# Allegro board mpu6050-layout.brd
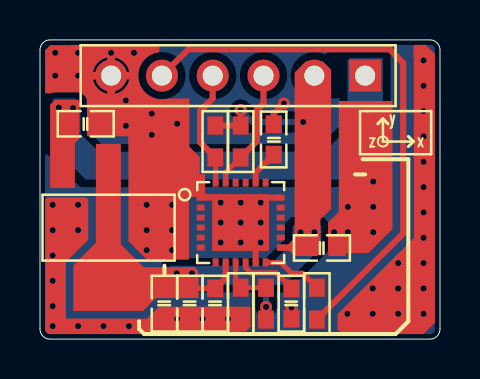
[diagram p0: board, top side]
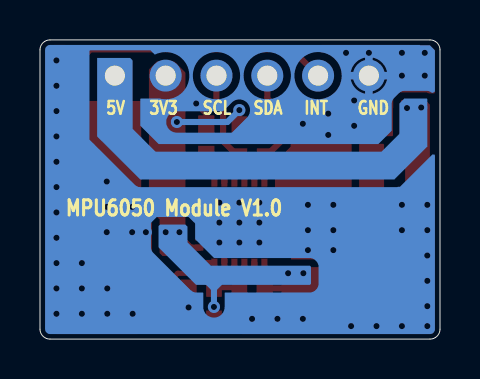
[diagram p1: board, bottom side, seen from below]

Outline 20 x 15 mm; copper layers: TOP, BOTTOM. Coordinates in mm from the lower left corner of the outline.
Outline path: 0,14.5 0,0.5 arc(0.15,0.15) 0.5,0 19.5,0 arc(19.85,0.15) 20,0.5 20,14.5 arc(19.85,14.85) 19.5,15 0.5,15 arc(0.15,14.85) 0,14.5

## Design rules (mm)
net group PWR: nets GND VCC_3V3 VCC_5V

## Placement (name value [footprint] x y rotation side)
C1  104  [C0603]  14.1 4.57 0 top
C2  104  [C0603]  8.76 1.78 270 top
C3  104  [C0603]  12.57 1.78 270 top
C4  2.2uF  [C0603]  11.68 10.01 90 top
C5  106  [C0603]  2.29 10.79 0 top
C6  106  [C0603]  6.22 1.78 270 top
C7  104  [C0603]  7.49 1.78 270 top
J1  CON6  [SIP-6]  16.26 13.21 180 top
NOREF  -  []  19.43 0 90 top
NOREF#2  -  []  0 14.5 0 top
R1  1k  [R0603]  13.84 1.78 90 top
R2  10k  [R0603]  8.76 9.91 90 top
R3  10k  [R0603]  10.03 9.91 90 top
R4  0R  [R0603]  10.03 1.78 90 top
R5  NC  [R0603]  11.3 1.78 90 top
U1  MPU6050  [QFN-24]  10.03 5.84 0 top
U2  AMS1117-3V3  [SOT-223]  3.43 5.59 180 top

## Library data of the parts
C1-C7 = CAP NP
J1 = CON6
R1-R5 = R
U1 = MPU6050_0
U2 = AMS1117-3V3

## Footprints (pads in the part's own frame, mm; a bottom-side part is the same pattern mirrored in y, then rotated)
C0603
  rect 0.889x0.813 smd: 1(-0.762,0) 2(0.762,0)
QFN-24
  rect 0.399x0.3 smd: 1(-2,1.25) 2(-2,0.75) 3(-2,0.25) 4(-2,-0.25) 5(-2,-0.75) 6(-2,-1.25) 13(2,-1.25) 14(2,-0.75) 15(2,-0.25) 16(2,0.25) 17(2,0.75) 18(2,1.25)
  rect 0.3x0.399 smd: 7(-1.25,-2) 8(-0.75,-2) 9(-0.25,-2) 10(0.25,-2) 11(0.75,-2) 12(1.25,-2) 19(1.25,2) 20(0.75,2) 21(0.25,2) 22(-0.25,2) 23(-0.75,2) 24(-1.25,2)
  rect 2.799x2.799 smd: 25(0,0)
R0603
  rect 0.914x0.787 smd: 1(-0.8,0) 2(0.8,0)
SIP-6
  rect 1.6x1.6 hole 1.001: 1(0,0)
  round 1.6 hole 1.001: 2(2.54,0) 3(5.08,0) 4(7.62,0) 5(10.16,0) 6(12.7,0)
SOT-223
  rect 1.199x2.2 smd: 1(-2.3,-3.1) 2(0,-3.1) 3(2.3,-3.1)
  rect 3.5x2.149 smd: 4(0,3.1)

## Nets
GND: C1.2 C2.2 C3.2 C4.2 C5.2 C6.2 C7.2 J1.6 R4.1 U1.1(CLKIN) U1.11(FSYNC) U1.18(GND) U1.25(PGND) U2.1(GND)
VCC_3V3: C1.1 C2.1 C6.1 C7.1 J1.2 R2.2 R3.2 R5.1 U1.8(VLOGIC) U1.13(VDD) U2.2(OUT0) U2.4(OUT1)
VCC_5V: C5.1 J1.1 U2.3(IN)
AD0: R4.2 R5.2 U1.9(AD0)
MPU_INT: J1.5 R1.1
MPU_SCL: J1.3 R3.1 U1.23(SCL)
MPU_SDA: J1.4 R2.1 U1.24(SDA)
N00818: R1.2 U1.12(INT)
N01663: C4.1 U1.20(CPOUT)
N01670: C3.1 U1.10(REGOUT)

Pads without a net: U1 2 3 4 5 6 7 14 15 16 17 19 21 22

## Via types
v1: diameter 0.61, hole 0.305, TOP to BOTTOM, 74 vias

## Routing (per net, layer and track width the routed paths; a pad name or vN(x,y) marks a point on that pad's centre or on a via; arc(x,y) is an arc through that point)
GND: length 17
  TOP w0.305: U1.1 8.78,7.09 v1(9.03,6.84) v1(10.03,5.84) ; U1.18 11.28,7.09 v1(11.03,6.84) v1(10.03,5.84) ; U1.11 10.78,5.09 v1(10.03,5.84) ; C4.2 11.68,11.3 v1(12.19,11.81) ; v1(12.57,1.59) C3.2
  TOP w0.381: 3.56,12.23 J1.6 ; J1.6 3.56,14.19 ; J1.6 2.58,13.21 ; J1.6 4.53,13.21
  BOTTOM w0.381: J1.6 3.56,14.19 ; J1.6 3.56,12.23 ; J1.6 4.53,13.21 ; J1.6 2.58,13.21
  vias: v1(0.64,6.73) v1(0.64,5.46) v1(0.64,4.19) v1(0.64,2.92) v1(0.64,1.65) v1(0.64,0.65) v1(0.76,14.35) v1(0.76,13.21) v1(1.91,14.35) v1(1.91,13.21) v1(1.91,6.73) v1(1.91,5.46) v1(1.91,0.65) v1(3.17,0.65) v1(3.56,14.35) v1(4.29,11.96) v1(4.29,10.69) v1(4.45,0.65) v1(4.7,14.35) v1(5.33,6.73) v1(5.33,5.46) v1(5.33,4.46) v1(5.59,11.3) v1(5.59,10.24) v1(6.6,6.73) v1(6.6,5.46) v1(6.6,4.46) v1(6.86,10.79) v1(6.86,1.02) v1(8.13,1.02) v1(9.03,5.84) v1(9.03,4.84) v1(9.4,1.02) v1(10.03,6.84) v1(10.03,4.84) v1(11.03,5.84) v1(11.03,4.84) v1(14.71,5.36) v1(15.39,6.63) v1(15.39,5.36) v1(15.37,1.27) v1(16.64,2.54) v1(16.64,1.27) v1(16.66,7.9) v1(16.66,6.63) v1(16.66,5.36) v1(17.91,3.81) v1(17.91,2.54) v1(17.91,1.27) v1(19.18,13.97) v1(19.18,12.7) v1(19.18,11.43) v1(19.18,10.16) v1(19.18,8.89) v1(19.18,7.62) v1(19.18,6.35) v1(19.18,5.08) v1(19.18,3.81) v1(19.18,2.54) v1(19.18,1.27)
VCC_3V3: length 12
  TOP w0.305: v1(10.03,11.48) R3.2 R2.2 ; U1.13 12.47,4.59 12.73,4.85 ; v1(11.3,1.61) R5.1 ; U1.8 9.28,3.06 C2.1 C7.1
  BOTTOM w0.305: v1(13.16,10.88) 10.63,10.88 v1(10.03,11.48) ; 11.3,2.54 10.95,2.9 ; 11.3,2.54 v1(11.3,1.61) ; 11.3,2.54 11.63,2.87 ; 11.3,2.54 11.3,3.05
  vias: v1(6.83,3.3) v1(7.59,3.3) v1(13.03,5.36) v1(13.72,5.36)
VCC_5V:
  vias: v1(0.94,11.61) v1(1.65,11.58)
AD0: length 2.6
  TOP w0.254: R5.2 R4.2 9.78,2.83 U1.9
MPU_INT: length 27.5
  TOP w0.305: R1.1 18.16,5.3 18.16,13.84 17.48,14.53 7.42,14.53 J1.5
MPU_SCL: length 6.2
  TOP w0.254: R3.1 9.28,8.36 U1.23
  TOP w0.305: J1.3 11.18,11.81 10.85,11.48 10.85,9.92 R3.1
MPU_SDA: length 6
  TOP w0.254: U1.24 8.78,9.09 R2.1
  TOP w0.305: R2.1 8,9.87 8,11.43 8.64,12.06 J1.4
N00818: length 3.1
  TOP w0.254: U1.12 12.03,3.84 12.57,3.3 13.12,3.3 R1.2
N01663: length 1.8
  TOP w0.305: C4.1 10.78,8.34 U1.20
N01670: length 3
  TOP w0.254: C3.1 12.57,2.55 11.81,3.31 11.8,3.31 11.79,3.33 10.54,3.33 10.28,3.58 U1.10

## Copper pours and planes (outline as drawn; the poured copper is in the pictures)
GND on TOP (solid shape): 19.3,14.73 19.75,14.29 19.75,0.82 19.18,0.25 15.11,0.25 14.87,0.49 14.87,1.25 18.68,5.06 18.69,5.08 18.69,5.1 18.69,14.04 18.69,14.06 18.67,14.1 18.67,14.7 18.68,14.73 18.72,14.75 19.3,14.75
GND on TOP (solid shape): 2.41,6.99 2.41,5 2.41,4.99 2.4,4.97 1.42,3.99 1.38,3.95 1.31,3.93 1.3,3.89 1.3,3.69 1.3,1.47 1.3,1.08 1.31,1.05 1.35,1.03 5.35,1.03 5.94,1.63 10.45,1.63 10.53,1.55 10.53,0.62 10.29,0.38 10.03,0.38 9.91,0.25 0.5,0.25 0.33,0.33 0.25,0.5 0.25,6.99 0.38,7.11 2.29,7.11
GND on TOP (solid shape): 5.92,14.75 5.95,14.74 5.96,14.72 5.97,14.7 5.97,14.41 5.94,14.38 5.88,14.37 5.78,14.35 5.69,14.32 5.6,14.28 5.52,14.24 5.43,14.19 5.36,14.13 5.28,14.07 5.22,14 5.15,13.92 5.1,13.84 5.05,13.76 5.01,13.67 4.97,13.58 4.95,13.49 4.93,13.39 4.92,13.3 4.91,13.2 4.92,13.1 4.93,13.01 4.95,12.91 4.98,12.82 5.02,12.73 5.06,12.64 5.11,12.56 5.16,12.48 5.23,12.41 5.3,12.34 5.37,12.27 5.46,12.21 5.56,12.16 5.65,12.11 5.85,12.05 5.95,12.04 6.05,12.03 6.15,12.03 6.24,12.04 6.34,12.05 6.39,12.07 7.42,12.07 7.45,12.06 7.46,12.04 7.47,12.01 7.48,9.64 7.97,9.14 7.99,9.11 7.99,8.3 8.02,8.27 8.23,8.26 8.24,8.25 8.25,8.22 8.25,7.31 8.26,7.28 8.27,7.27 8.3,7.26 11.38,7.26 11.41,7.25 11.42,7.24 11.45,6.97 11.45,4.47 11.44,4.44 11.43,4.43 11.4,4.42 8.66,4.42 8.64,4.43 8.62,4.44 8.61,4.47 8.61,7.07 8.61,7.1 8.59,7.11 8.56,7.12 7.5,7.12 7.47,7.11 7.46,7.1 7.45,7.07 7.45,4.04 7.44,4.01 7.43,4 7.4,3.99 5.36,3.99 5.32,4 4.43,4.89 4.42,4.93 4.42,9.73 4.41,9.82 4.41,10.12 4.4,10.15 4.39,10.16 4.36,10.17 2.4,10.17 2.37,10.18 2.36,10.19 2.35,10.22 2.35,11.58 2.34,11.58 2.34,11.94 2.34,11.97 2.33,12.02 2.31,12.08 2.29,12.13 2.26,12.18 2.23,12.22 2.19,12.26 2.15,12.3 2.1,12.33 2.04,12.35 1.99,12.36 1.93,12.37 1.91,12.37 0.76,12.37 0.73,12.37 0.66,12.36 0.6,12.34 0.54,12.32 0.3,12.32 0.28,12.33 0.26,12.34 0.25,12.37 0.25,13.25 2.63,13.25 2.63,13.17 2.64,13.08 2.65,13 2.68,12.91 2.71,12.83 2.75,12.76 2.79,12.68 2.84,12.62 2.9,12.55 2.96,12.49 3.03,12.44 3.1,12.4 3.18,12.36 3.26,12.33 3.34,12.3 3.43,12.29 3.51,12.28 3.6,12.28 3.68,12.29 3.77,12.3 3.85,12.33 3.93,12.36 4.01,12.4 4.08,12.44 4.15,12.49 4.21,12.55 4.27,12.62 4.32,12.68 4.37,12.76 4.4,12.83 4.44,12.91 4.46,13 4.47,13.08 4.48,13.17 4.48,13.25 4.47,13.34 4.46,13.42 4.44,13.5 4.4,13.58 4.37,13.66 4.32,13.73 4.27,13.8 4.21,13.86 4.15,13.92 4.08,13.97 4.01,14.02 3.93,14.06 3.85,14.09 3.77,14.11 3.68,14.13 3.6,14.13 3.51,14.13 3.43,14.13 3.34,14.11 3.26,14.09 3.18,14.06 3.1,14.02 3.03,13.97 2.96,13.92 2.9,13.86 2.84,13.8 2.79,13.73 2.75,13.66 2.71,13.58 2.68,13.5 2.65,13.42 2.64,13.34 2.63,13.25 0.25,13.25 0.25,14.48 0.51,14.73 1.51,14.73 1.52,14.75
GND on BOTTOM (solid shape): 19.5,14.75 19.52,14.75 19.56,14.74 19.6,14.72 19.64,14.7 19.67,14.67 19.7,14.64 19.72,14.6 19.74,14.56 19.75,14.52 19.75,14.5 19.75,0.5 19.75,0.48 19.74,0.44 19.72,0.4 19.7,0.36 19.67,0.33 19.64,0.3 19.6,0.28 19.56,0.26 19.52,0.25 19.5,0.25 0.5,0.25 0.48,0.25 0.44,0.26 0.4,0.28 0.36,0.3 0.33,0.33 0.3,0.36 0.28,0.4 0.26,0.44 0.25,0.48 0.25,0.5 0.25,3.61 6.07,3.61 6.07,2.79 6.07,2.76 6.08,2.71 6.09,2.65 6.11,2.6 6.14,2.55 6.18,2.5 6.24,2.44 6.28,2.41 6.33,2.38 6.38,2.36 6.44,2.34 6.5,2.34 6.52,2.34 10.75,2.34 10.77,2.3 10.77,1.61 10.77,1.58 10.78,1.52 10.79,1.45 10.82,1.39 10.85,1.34 10.88,1.28 10.93,1.24 10.97,1.19 11.03,1.16 11.08,1.13 11.14,1.1 11.21,1.09 11.27,1.08 11.34,1.08 11.4,1.09 11.46,1.1 11.52,1.13 11.58,1.16 11.63,1.19 11.68,1.24 11.72,1.28 11.76,1.34 11.79,1.39 11.81,1.45 11.83,1.52 11.84,1.58 11.84,1.61 11.84,2.32 11.88,2.34 12.17,2.34 12.2,2.34 12.26,2.34 12.31,2.36 12.36,2.38 12.41,2.41 12.46,2.44 12.48,2.46 14.33,4.31 14.35,4.33 14.38,4.38 14.41,4.43 14.43,4.48 14.44,4.53 14.45,4.59 14.45,4.62 14.45,5.81 14.44,5.84 14.17,6.11 14.14,6.12 12.59,6.12 12.55,6.11 12.26,5.81 12.24,5.78 12.24,5.03 12.23,4.99 11.31,4.08 11.28,4.06 6.52,4.06 6.5,4.06 6.44,4.06 6.38,4.04 6.33,4.02 6.28,3.99 6.24,3.96 6.18,3.9 6.14,3.85 6.11,3.8 6.09,3.75 6.08,3.7 6.07,3.64 6.07,3.61 0.25,3.61 0.25,9.2 0.26,9.23 0.28,9.25 0.4,9.24 1.99,7.65 2.1,7.63 2.15,7.62 14.96,7.62 14.99,7.62 15.05,7.63 15.1,7.64 15.16,7.66 15.21,7.69 15.25,7.73 15.27,7.75 17.51,9.99 17.53,10.02 17.53,14.43 17.52,14.46 17.5,14.47 17.48,14.48 15.34,14.48 14.5,14.48 14.18,14.3 14.09,14.33 14,14.36 13.9,14.37 13.81,14.39 13.71,14.39 13.62,14.39 13.53,14.37 13.43,14.36 13.34,14.33 13.25,14.29 13.17,14.25 13.08,14.21 13.01,14.15 12.93,14.09 12.86,14.03 12.8,13.95 12.74,13.88 12.69,13.8 12.65,13.71 12.61,13.62 12.58,13.53 12.56,13.44 12.54,13.34 12.53,13.24 12.54,13.15 12.55,13.05 12.56,12.95 12.59,12.86 12.62,12.77 12.66,12.68 12.71,12.59 12.76,12.51 12.82,12.44 12.89,12.37 12.96,12.3 13.04,12.24 13.12,12.19 13.2,12.14 13.29,12.1 13.38,12.07 13.48,12.05 13.57,12.03 13.67,12.03 13.77,12.03 13.86,12.04 13.96,12.05 14.01,12.07 14.94,12.07 14.96,12.06 14.98,12.04 14.99,12.01 14.99,10.72 14.97,10.68 14.08,9.79 14.05,9.78 3.1,9.78 3.06,9.79 2.43,10.43 2.41,10.47 2.41,11.48 9.5,11.48 9.5,11.42 9.51,11.35 9.53,11.29 9.56,11.23 9.59,11.18 9.63,11.13 9.66,11.1 10.39,10.37 10.43,10.35 13.16,10.35 13.19,10.35 13.25,10.36 13.32,10.37 13.38,10.4 13.43,10.43 13.49,10.46 13.53,10.51 13.58,10.55 13.61,10.61 13.64,10.66 13.67,10.73 13.68,10.79 13.69,10.85 13.69,10.92 13.68,10.98 13.67,11.04 13.64,11.1 13.61,11.16 13.58,11.21 13.53,11.26 13.49,11.3 13.43,11.34 13.38,11.37 13.32,11.39 13.25,11.41 13.19,11.42 13.16,11.42 10.87,11.42 10.84,11.43 10.41,11.86 10.39,11.88 10.34,11.92 10.28,11.95 10.22,11.98 10.16,12 10.1,12.01 10.03,12.01 9.97,12.01 9.91,12 9.84,11.98 9.78,11.95 9.73,11.92 9.68,11.88 9.63,11.83 9.59,11.78 9.56,11.73 9.53,11.67 9.51,11.61 9.5,11.55 9.5,11.48 2.41,11.48 2.41,11.79 2.41,11.82 2.41,11.87 2.39,11.93 2.37,11.98 2.34,12.03 2.31,12.07 2.29,12.1 2.06,12.32 2.04,12.34 2,12.37 1.95,12.4 1.9,12.42 1.84,12.44 1.79,12.45 1.76,12.45 0.69,12.45 0.66,12.45 0.6,12.44 0.55,12.42 0.5,12.4 0.45,12.37 0.26,12.41 0.25,12.43 0.25,13.25 2.63,13.25 2.63,13.17 2.64,13.08 2.65,13 2.68,12.91 2.71,12.83 2.75,12.76 2.79,12.68 2.84,12.62 2.9,12.55 2.96,12.49 3.03,12.44 3.1,12.4 3.18,12.36 3.26,12.33 3.34,12.3 3.43,12.29 3.51,12.28 3.6,12.28 3.68,12.29 3.77,12.3 3.85,12.33 3.93,12.36 4.01,12.4 4.08,12.44 4.15,12.49 4.21,12.55 4.27,12.62 4.32,12.68 4.37,12.76 4.4,12.83 4.44,12.91 4.46,13 4.47,13.08 4.48,13.17 4.48,13.26 4.92,13.26 4.92,13.16 4.92,13.06 4.94,12.97 4.96,12.87 5,12.78 5.03,12.69 5.08,12.6 5.13,12.52 5.19,12.44 5.26,12.37 5.33,12.31 5.41,12.25 5.49,12.19 5.58,12.15 5.67,12.11 5.76,12.08 5.85,12.05 5.95,12.04 6.05,12.03 6.14,12.03 6.24,12.04 6.34,12.05 6.43,12.08 6.53,12.11 6.61,12.15 6.7,12.19 6.78,12.25 6.86,12.31 6.93,12.37 7,12.44 7.06,12.52 7.11,12.6 7.16,12.69 7.2,12.78 7.23,12.87 7.25,12.97 7.27,13.06 7.28,13.16 7.28,13.26 7.46,13.26 7.46,13.16 7.46,13.06 7.48,12.97 7.5,12.87 7.54,12.78 7.57,12.69 7.62,12.6 7.67,12.52 7.73,12.44 7.8,12.37 7.87,12.31 7.95,12.25 8.03,12.19 8.12,12.15 8.21,12.11 8.3,12.08 8.39,12.05 8.49,12.04 8.59,12.03 8.68,12.03 8.78,12.04 8.88,12.05 8.97,12.08 9.07,12.11 9.15,12.15 9.24,12.19 9.32,12.25 9.4,12.31 9.47,12.37 9.54,12.44 9.6,12.52 9.65,12.6 9.7,12.69 9.74,12.78 9.77,12.87 9.79,12.97 9.81,13.06 9.82,13.16 9.82,13.26 10,13.26 10,13.16 10,13.06 10.02,12.97 10.04,12.87 10.08,12.78 10.11,12.69 10.16,12.6 10.21,12.52 10.27,12.44 10.34,12.37 10.41,12.31 10.49,12.25 10.57,12.19 10.66,12.15 10.75,12.11 10.84,12.08 10.93,12.05 11.03,12.04 11.13,12.03 11.22,12.03 11.32,12.04 11.42,12.05 11.51,12.08 11.61,12.11 11.69,12.15 11.78,12.19 11.86,12.25 11.94,12.31 12.01,12.37 12.08,12.44 12.14,12.52 12.19,12.6 12.24,12.69 12.28,12.78 12.31,12.87 12.33,12.97 12.35,13.06 12.36,13.16 12.36,13.26 12.35,13.35 12.33,13.45 12.31,13.55 12.28,13.64 12.24,13.73 12.19,13.81 12.14,13.89 12.08,13.97 12.01,14.04 11.94,14.11 11.86,14.17 11.78,14.22 11.69,14.27 11.61,14.31 11.51,14.34 11.42,14.36 11.32,14.38 11.22,14.39 11.13,14.39 11.03,14.38 10.93,14.36 10.84,14.34 10.75,14.31 10.66,14.27 10.57,14.22 10.49,14.17 10.41,14.11 10.34,14.04 10.27,13.97 10.21,13.89 10.16,13.81 10.11,13.73 10.08,13.64 10.04,13.55 10.02,13.45 10,13.35 10,13.26 9.82,13.26 9.81,13.35 9.79,13.45 9.77,13.55 9.74,13.64 9.7,13.73 9.65,13.81 9.6,13.89 9.54,13.97 9.47,14.04 9.4,14.11 9.32,14.17 9.24,14.22 9.15,14.27 9.07,14.31 8.97,14.34 8.88,14.36 8.78,14.38 8.68,14.39 8.59,14.39 8.49,14.38 8.39,14.36 8.3,14.34 8.21,14.31 8.12,14.27 8.03,14.22 7.95,14.17 7.87,14.11 7.8,14.04 7.73,13.97 7.67,13.89 7.62,13.81 7.57,13.73 7.54,13.64 7.5,13.55 7.48,13.45 7.46,13.35 7.46,13.26 7.28,13.26 7.27,13.35 7.25,13.45 7.23,13.55 7.2,13.64 7.16,13.73 7.11,13.81 7.06,13.89 7,13.97 6.93,14.04 6.86,14.11 6.78,14.17 6.7,14.22 6.61,14.27 6.53,14.31 6.43,14.34 6.34,14.36 6.24,14.38 6.14,14.39 6.05,14.39 5.95,14.38 5.85,14.36 5.76,14.34 5.67,14.31 5.58,14.27 5.49,14.22 5.41,14.17 5.33,14.11 5.26,14.04 5.19,13.97 5.13,13.89 5.08,13.81 5.03,13.73 5,13.64 4.96,13.55 4.94,13.45 4.92,13.35 4.92,13.26 4.48,13.26 4.47,13.34 4.46,13.42 4.44,13.5 4.4,13.58 4.37,13.66 4.32,13.73 4.27,13.8 4.21,13.86 4.15,13.92 4.08,13.97 4.01,14.02 3.93,14.06 3.85,14.09 3.77,14.11 3.68,14.13 3.6,14.13 3.51,14.13 3.43,14.13 3.34,14.11 3.26,14.09 3.18,14.06 3.1,14.02 3.03,13.97 2.96,13.92 2.9,13.86 2.84,13.8 2.79,13.73 2.75,13.66 2.71,13.58 2.68,13.5 2.65,13.42 2.64,13.34 2.63,13.25 0.25,13.25 0.25,14.46 0.27,14.49 0.49,14.72 0.53,14.73 0.99,14.73 1.02,14.75
VCC_3V3 on TOP (solid shape): 14.55,13.51 14.55,6.53 14.02,5.99 14.02,4.34 14.02,4.32 14.01,4.3 13.88,4.18 13.87,4.17 13.85,4.17 12.75,4.17 12.73,4.17 12.71,4.18 12.46,4.43 12.44,4.44 12.42,4.45 11.89,4.45 11.85,4.46 11.84,4.5 11.84,4.51 11.85,4.55 11.89,4.56 12.56,4.56 12.6,4.58 12.61,4.61 12.62,4.94 12.63,4.96 12.71,5.04 12.72,5.06 12.73,5.08 12.73,13.36 13.28,13.92 14.15,13.92
VCC_5V on BOTTOM (solid shape): 17.14,10.16 15,8.02 14.98,8 14.96,8 2.29,8 0.64,9.65 0.64,12.01 0.65,12.05 0.69,12.06 1.76,12.06 1.78,12.06 1.79,12.05 2.02,11.83 2.03,11.81 2.03,11.79 2.03,10.31 2.04,10.29 2.05,10.27 2.91,9.41 2.92,9.4 2.94,9.4 14.2,9.4 14.22,9.4 14.24,9.41 15.35,10.53 15.36,10.54 15.37,10.56 15.37,13.97 15.49,14.1 17.14,14.1
GND on TOP (solid shape): 17.58,11.94 17.61,11.92 17.63,11.89 17.63,5.54 17.62,5.52 17.61,5.5 16.44,4.33 16.43,4.32 16.41,4.32 14.45,4.32 14.42,4.33 14.4,4.37 14.4,5.82 14.41,5.83 14.42,5.85 14.92,6.36 14.93,6.37 14.94,6.39 14.94,11.89 14.95,11.92 14.99,11.94
VCC_3V3 on TOP (solid shape): 3.99,9.78 4.02,9.76 4.04,9.73 4.04,4.77 4.04,4.75 4.05,4.73 5.17,3.62 5.18,3.61 5.2,3.61 7.7,3.61 7.72,3.6 7.74,3.59 7.91,3.42 7.92,3.4 7.92,3.38 7.92,2.1 7.92,2.08 7.89,2.06 5.81,2.06 5.79,2.05 5.78,2.04 5.17,1.44 5.15,1.43 5.14,1.42 1.73,1.42 1.69,1.44 1.68,1.47 1.68,3.69 1.68,3.71 1.69,3.72 2.78,4.81 2.79,4.83 2.79,4.85 2.79,9.73 2.81,9.76 2.84,9.78
VCC_3V3 on BOTTOM (solid shape): 14.07,5.67 14.07,4.62 14.07,4.6 14.06,4.58 12.21,2.73 12.19,2.72 12.17,2.72 6.52,2.72 6.5,2.72 6.49,2.73 6.47,2.75 6.46,2.77 6.45,2.79 6.45,3.61 6.46,3.63 6.47,3.65 6.49,3.67 6.5,3.68 6.52,3.68 11.43,3.68 11.45,3.69 11.47,3.7 12.61,4.84 12.62,4.85 12.62,4.87 12.62,5.64 12.73,5.74 14,5.74
VCC_5V on TOP (solid shape): 1.91,11.99 1.94,11.97 1.96,11.94 1.96,10.05 1.95,10.03 1.94,10.02 1.74,9.82 1.73,9.8 1.73,9.78 1.73,7.62 1.71,7.58 1.68,7.57 0.58,7.57 0.56,7.57 0.54,7.58 0.52,7.61 0.51,7.62 0.51,7.64 0.51,11.74 0.51,11.76 0.52,11.78 0.72,11.97 0.74,11.98 0.76,11.99

## Text on the board
Ref Des/Silkscreen Bottom: GND | INT | SDA | SCL | 3V3 | 5V | MPU6050 Module V1.0
Ref Des/Silkscreen Top: z | y | x
DIMENSION: FIGURE | SIZE | 12.0 | 39.402 | DRILL CHART: TOP to BOTTOM | ALL UNITS ARE IN MILS | PLATED | QTY | 74 | 5 | 1
